# Altium PCB UZ_A_MAX11331.PcbDoc
Units mm, origin at the board's own origin, x right, y up, seen from the top; angles counter-clockwise.
Board outline 156 x 100 mm, 4 copper layers (Top Layer, GND, VCC, Bottom Layer), stack 0.778 mm thick; 30 components, 61 nets, 157 pads, 0 vias.
Unrouted connection lines stored in the file: 86.
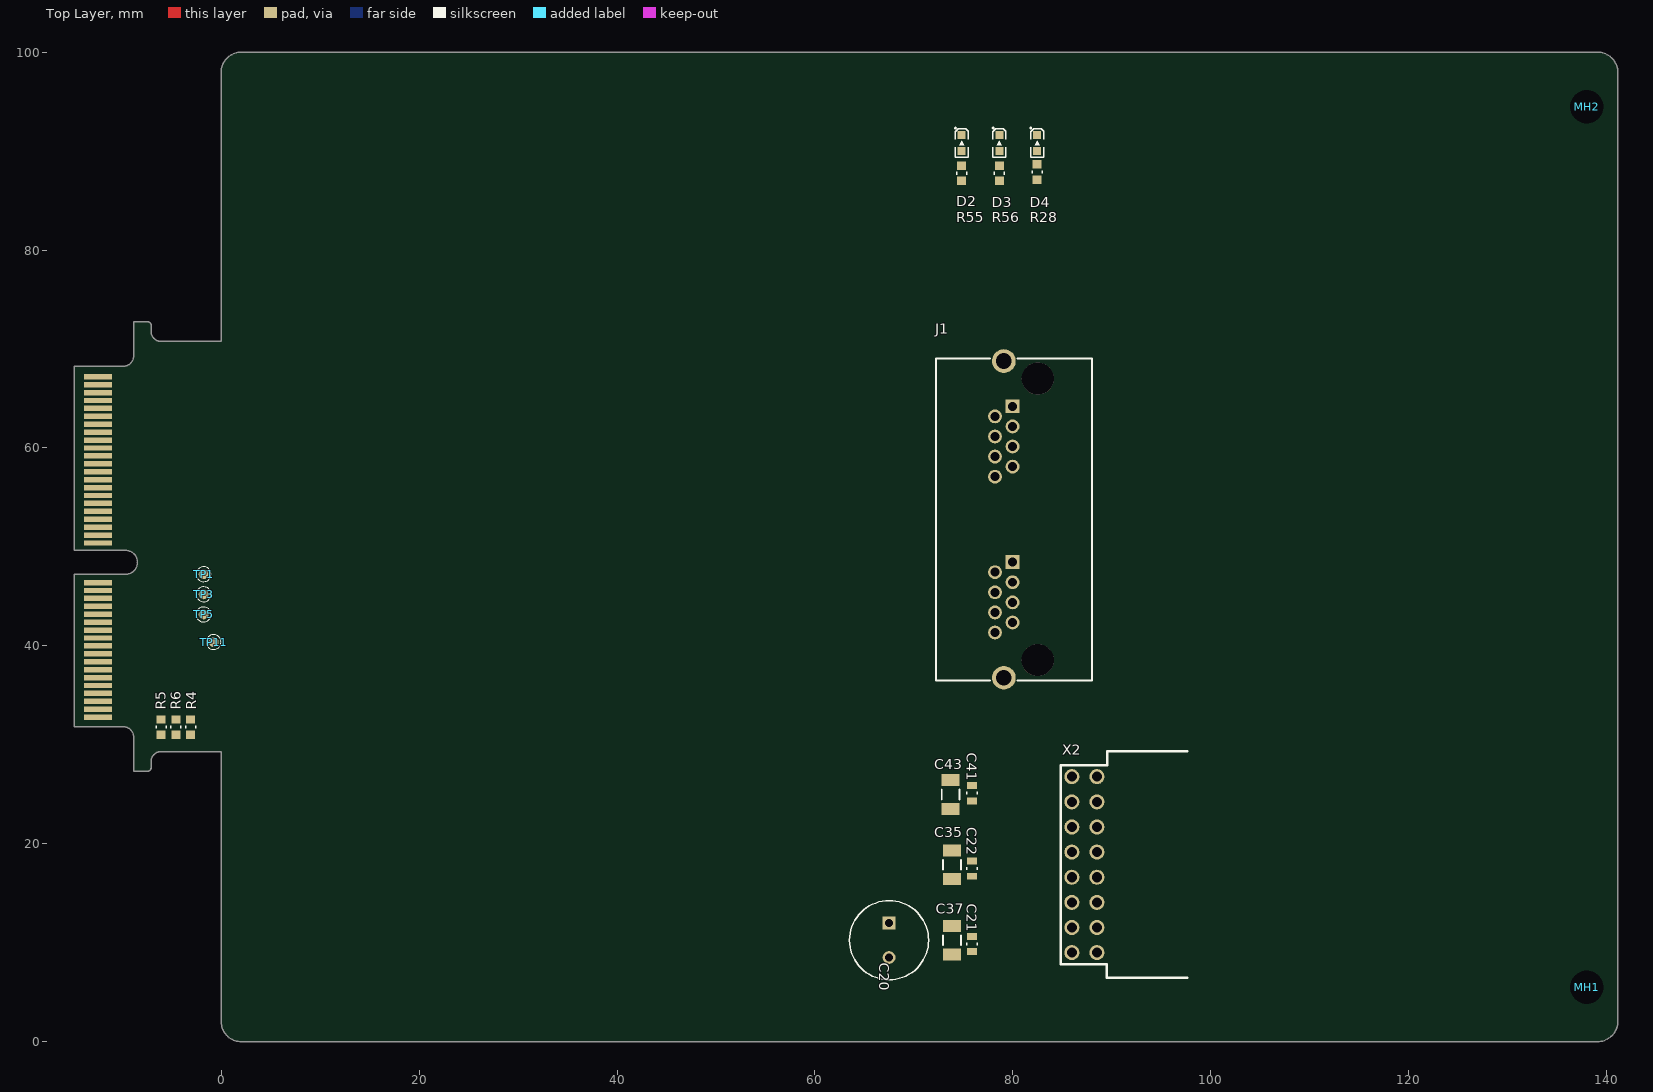
[diagram p0: Top Layer view]
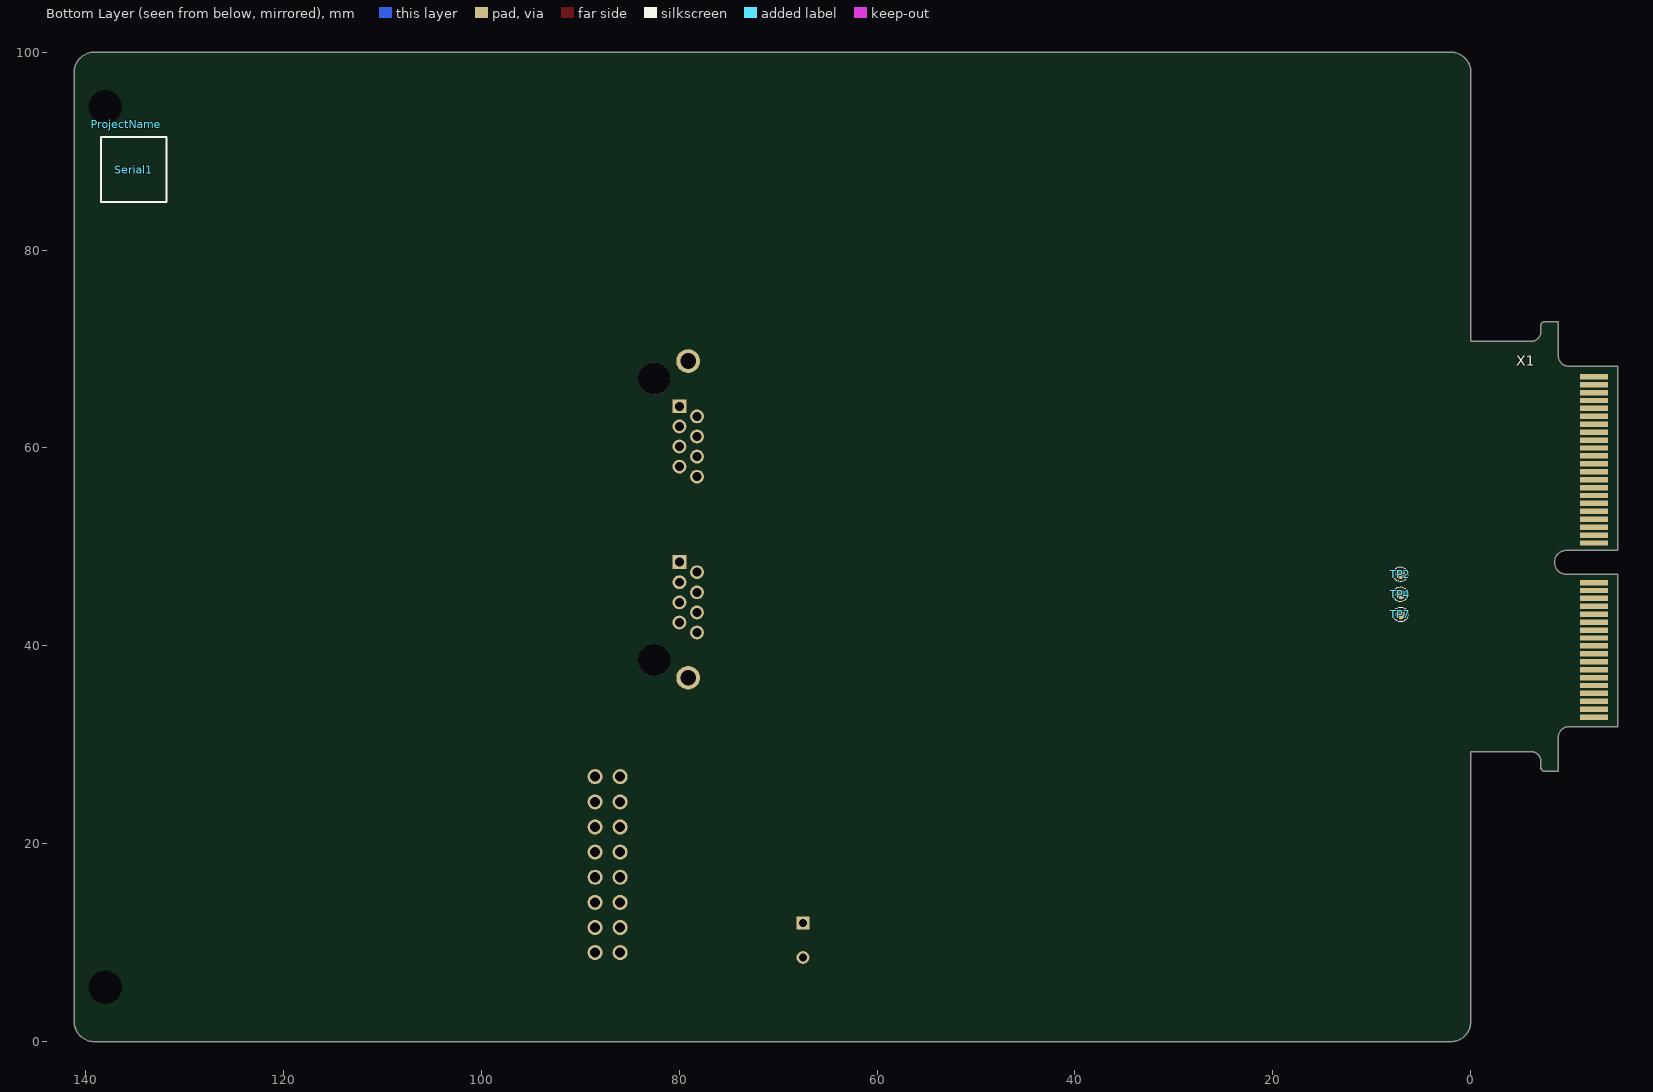
[diagram p1: Bottom Layer view, seen from below]

## Layer stack, top to bottom
Top Solder: solder mask 0.0102, Solder Resist, Dk 3.5
Top Layer: signal copper 0.0356
Dielectric 1: core 0.254, FR-4, Dk 4.2
GND: signal copper 0.036
Dielectric 3: prepreg 0.127, Dk 4.2
VCC: signal copper 0.036
Dielectric 2: core 0.254, Dk 4.2
Bottom Layer: signal copper 0.0356
Bottom Solder: solder mask 0.0102, Solder Resist, Dk 3.5

## Board outline
-14.859,31.821 -9.859,31.821 cw(c-9.859,30.821) -8.859,30.821 -8.859,27.321 -7.479,27.321 ccw(c-7.479,27.721) -7.079,27.721 -7.079,28.321 cw(c-6.079,28.321) -6.079,29.321 0,29.321 0,2.007 ccw(c2.032,2.032) 2.057,0 139.1,0 ccw(c139.1,2.04) 141.14,2.04 141.14,97.96 ccw(c139.1,97.96) 139.1,100 2.032,100 ccw(c2.032,97.968) 0,97.968 0,70.771 -6.079,70.771 cw(c-6.079,71.771) -7.079,71.771 -7.079,72.371 ccw(c-7.479,72.371) -7.479,72.771 -8.859,72.771 -8.859,69.271 cw(c-9.859,69.271) -9.859,68.271 -14.859,68.271 -14.859,49.646 -9.659,49.646 cw(c-9.659,48.446) -9.659,47.246 -14.859,47.246

## Design rules (kind name [scope] priority, off if disabled: settings)
BoardOutlineClearance BoardOutlineClearance_TopOverlay [OnLayer('Top Overlay') or OnLayer('Bottom Overlay')] p1: gap=0 ignorepadtopadclearanceinfootprint=FALSE
BoardOutlineClearance [All] p2: gap=0.508 ignorepadtopadclearanceinfootprint=FALSE except(0: Arc-SplitContinuation Track-SplitContinuation SMDPad-SplitContinuation THPad-SplitContinuation Via-SplitContinuation Fill-SplitContinuation Poly-SplitContinuation Region-SplitContinuation Text-OutlineEdge Text-CavityEdge Text-CutoutEdge Text-SplitBarrior Text-SplitContinuation; 0.254: SMDPad-OutlineEdge SMDPad-CavityEdge SMDPad-CutoutEdge SMDPad-SplitBarrior)
Clearance [All] p1: gap=0.089 ignorepadtopadclearanceinfootprint=FALSE except(0: Arc-Text Arc-Hole Track-Text Track-Hole SMDPad-Text SMDPad-Hole THPad-Text THPad-Hole Via-Text Via-Hole Fill-Text Fill-Hole Poly-Text Poly-Hole Region-Text Region-Hole Text-Text Text-Hole; 0.127: Arc-Via Track-Via SMDPad-Via THPad-Via Via-Via)
DiffPairsRouting [All] p1: maxlimit=0.254 minlimit=0.089 mostfreqgap=0.178 toplayer_minwidth=0.089 toplayer_maxwidth=0.381 toplayer_prefwidth=0.254 midlayer1_minwidth=0.089 midlayer1_maxwidth=0.381 midlayer1_prefwidth=0.254 midlayer2_minwidth=0.089 midlayer2_maxwidth=0.381 midlayer2_prefwidth=0.254 bottomlayer_minwidth=0.089 bottomlayer_maxwidth=0.381 bottomlayer_prefwidth=0.254 maxuncoupledlength=12.7
HoleSize [All] p1: absolutevalues=TRUE maxlimit=6.3 minlimit=0.2 maxpercent=80.000 minpercent=20.000
MatchedLengths [All] p1: tolerance=0.254 checknetsindiffpair=TRUE checkdiffpairvsdiffpair=FALSE checkxsignals=FALSE checkothers=FALSE
MinimumSolderMaskSliver [All] p1: minsoldermaskwidth=0.089
PlaneConnect [All] p1: pad.planeconnectstyle=Relief pad.reliefexpansion=0.508 pad.reliefentries=4 pad.reliefconductorwidth=0.254 pad.reliefairgap=0.254 via.planeconnectstyle=Direct via.reliefexpansion=0.508 via.reliefentries=4 via.reliefconductorwidth=0.254 via.reliefairgap=0.254
PolygonConnect PolygonConnect_GND [InNet('GND')] p1: thpad.connectstyle=Relief thpad.reliefconductorwidth=0.254 thpad.reliefentries=4 thpad.polygonreliefangle="90 Angle" thpad.airgapwidth=0.254 smdpad.connectstyle=Relief smdpad.reliefconductorwidth=0.254 smdpad.reliefentries=4 smdpad.polygonreliefangle="90 Angle" smdpad.airgapwidth=0.254 via.connectstyle=Direct via.reliefconductorwidth=0.254 via.reliefentries=4 via.polygonreliefangle="90 Angle" via.airgapwidth=0.254
PolygonConnect [All] p2: connectstyle=Direct reliefconductorwidth=0.254 reliefentries=4 polygonreliefangle="90 Angle" airgapwidth=0.127
RoomDefinition Component_KeepOut [All] p1: confinementstyle=ConfineOut formatcopy=TRUE lockcomponents=FALSE outline 0,97 142,97 142,100 0,100
RoutingVias [All] p1: holewidth=0.3 width=0.6 viastyle="Through Hole" minholewidth=0.2 minwidth=0.45 maxholewidth=0.8 maxwidth=1.6
SilkToSilkClearance [All] p1: silktosilkclearance=0
SilkToSolderMaskClearance [IsPad] p1: minsilkscreentomaskgap=0 clearancetoexposedcopper=TRUE
SolderMaskExpansion [All] p1: expansion=0.102 istentingtop=FALSE
Width [All] p1: maxlimit=0.762 minlimit=0.089 preferedwidth=0.254
24 further rules are at their usual default settings.

## Classes and differential pairs
net class AIN_B_P[1..4]: AIN_B_P1 AIN_B_P2 AIN_B_P3 AIN_B_P4
net class AIN_B_N[1..4]: AIN_B_N1 AIN_B_N2 AIN_B_N3 AIN_B_N4
net class AIN_A_P[1..4]: AIN_A_P1 AIN_A_P2 AIN_A_P3 AIN_A_P4
net class AIN_A_N[1..4]: AIN_A_N1 AIN_A_N2 AIN_A_N3 AIN_A_N4
component class U_CarrierConnector: R4 R5 R6 TP1 TP2 TP3 TP4 TP5 TP7 TP11 X1
component class U_AnalogConnector: C20 C21 C22 C35 C37 C41 C43 D2 D3 D4 J1 MH1 MH2 ProjectName R28 R55 R56 Serial1 X2

## Components (designator, comment, footprint, x,y, rotation, side; value= is the part's Value field where it differs from the comment)
C20 "220 uF" WCAP-ATG5_8X11.5X3.5 67.493,10.257 r90 top
C21 "100nF" CAPC1608X07N 75.875,9.876 r90 top
C22 "100nF" CAPC1608X07N 75.875,17.496 r90 top
C35 "10µF" C_1206 73.843,17.877 r270 top
C37 "10µF" C_1206 73.843,10.257 r270 top
C41 "100nF" CAPC1608X07N 75.875,25.116 r90 top
C43 "10µF" C_1206 73.716,24.989 r270 top
D2 "150060BS75000" WL-SMCW_0603 74.832,90.813 r270 top
D3 "150060GS75000" WL-SMCW_0603 78.642,90.813 r270 top
D4 "150060RS75000" WL-SMCW_0603 82.452,90.813 r270 top
J1 "RJHSE-5380-02" RJHSE-5380-02 82.518,38.558 r90 top
MH1 "mounting hole 3,4mm" MH_3.4#1 137.16,3.988 r0 top
MH2 "mounting hole 3,4mm" MH_3.4#2 137.16,94.437 r0 top
ProjectName "Project Name, Rev" ID_PROJECTREV 135.89,92.71 r180 bottom
R4 "0R" RESC1608X06N -3.086,31.79 r90 top
R5 "0R" RESC1608X06N -6.071,31.79 r270 top
R6 "0R" RESC1608X06N -4.572,31.79 r90 top
R28 "1k" RESC1608X06N 82.452,87.892 r270 top
R55 "20k" RESC1608X06N 74.832,87.765 r270 top
R56 "4.7k" RESC1608X06N 78.642,87.765 r270 top
Serial1 "Serialnumber 6,3 x 6.3mm" SERIAL_6.3X6.3MM 135.128,88.138 r180 bottom
TP1 "PIN47" TP_1MM -1.778,47.244 r0 top value="Testpoint 1mm"
TP2 "PIN48" TP_1MM 7.112,47.244 r180 bottom value="Testpoint 1mm"
TP3 "PIN49" TP_1MM -1.778,45.212 r0 top value="Testpoint 1mm"
TP4 "PIN50" TP_1MM 7.112,45.212 r180 bottom value="Testpoint 1mm"
TP5 "PIN53" TP_1MM -1.778,43.18 r0 top value="Testpoint 1mm"
TP7 "PIN56" TP_1MM 7.112,43.18 r180 bottom value="Testpoint 1mm"
TP11 "PIN53" TP_1MM -0.762,40.386 r0 top value="Testpoint 1mm"
X1 "HSEC8-140-01-XX-DV-A-BL-CARD" HSEC8-140-01-XX-DV-A-BL-CARD -14.846,50 r270 bottom
X2 "IPL1-108-01-L-D-RA-K" IPL1-108-01-L-D-RA-K 87.23,17.89 r270 top

## Footprints (in the part's own frame and the unit in brackets; to place one, negate y for a bottom-side part, rotate by r counter-clockwise, add the part's x,y. Pads: shape width x height; smd on the part's side, far side on the other; paste and mask are expansions set on the pad)
C_1206 [mm]
  rect 1.21x1.82 smd: 1(1.45,0) 2(-1.45,0)
  silkscreen extent -0.5,-0.9 0.5,0.9, body extent -1.6,-0.81 1.6,0.81, height 1.82
CAPC1608X07N [mm] "Chip Capacitor, 2-Leads, Body 1,60x0,80mm, IPC Medium Density"
  rect 0.7x1 smd: 1(-0.775,0) 2(0.775,0)
  silkscreen extent -0.13,-0.51 0.13,0.51, body extent -0.88,-0.48 0.88,0.47, height 0.7
HSEC8-140-01-XX-DV-A-BL-CARD [mm]
  rect 0.55x2.8 smd far side mask+0.05: 1(-17.2,-2.4) 3(-16.4,-2.4) 5(-15.6,-2.4) 7(-14.8,-2.4) 9(-14,-2.4) 11(-13.2,-2.4) 13(-12.4,-2.4) 15(-11.6,-2.4) 17(-10.8,-2.4) 19(-10,-2.4) 21(-9.2,-2.4) 23(-8.4,-2.4) 25(-7.6,-2.4) 27(-6.8,-2.4) 29(-6,-2.4) 31(-5.2,-2.4) 33(-4.4,-2.4) 35(-3.6,-2.4) 37(-2.8,-2.4) 39(-2,-2.4) 41(-1.2,-2.4) 43(-0.4,-2.4) 45(3.6,-2.4) 47(4.4,-2.4) 49(5.2,-2.4) 51(6,-2.4) 53(6.8,-2.4) 55(7.6,-2.4) 57(8.4,-2.4) 59(9.2,-2.4) 61(10,-2.4) 63(10.8,-2.4) 65(11.6,-2.4) 67(12.4,-2.4) 69(13.2,-2.4) 71(14,-2.4) 73(14.8,-2.4) 75(15.6,-2.4) 77(16.4,-2.4) 79(17.2,-2.4)
  rect 0.55x2.8 smd mask+0.05: 2(-17.2,-2.4) 4(-16.4,-2.4) 6(-15.6,-2.4) 8(-14.8,-2.4) 10(-14,-2.4) 12(-13.2,-2.4) 14(-12.4,-2.4) 16(-11.6,-2.4) 18(-10.8,-2.4) 20(-10,-2.4) 22(-9.2,-2.4) 24(-8.4,-2.4) 26(-7.6,-2.4) 28(-6.8,-2.4) 30(-6,-2.4) 32(-5.2,-2.4) 34(-4.4,-2.4) 36(-3.6,-2.4) 38(-2.8,-2.4) 40(-2,-2.4) 42(-1.2,-2.4) 44(-0.4,-2.4) 46(3.6,-2.4) 48(4.4,-2.4) 50(5.2,-2.4) 52(6,-2.4) 54(6.8,-2.4) 56(7.6,-2.4) 58(8.4,-2.4) 60(9.2,-2.4) 62(10,-2.4) 64(10.8,-2.4) 66(11.6,-2.4) 68(12.4,-2.4) 70(13.2,-2.4) 72(14,-2.4) 74(14.8,-2.4) 76(15.6,-2.4) 78(16.4,-2.4) 80(17.2,-2.4)
ID_PROJECTREV [mm] "project name + revision number"
IPL1-108-01-L-D-RA-K [mil]
  round 60 hole 40 mask+3: 1(-350,50) 2(-250,50) 3(-150,50) 4(-50,50) 5(50,50) 6(150,50) 7(250,50) 8(350,50) 9(-350,-50) 10(-250,-50) 11(-150,-50) 12(-50,-50) 13(50,-50) 14(150,-50) 15(250,-50) 16(350,-50)
  silkscreen extent -451,-94 451,410, body extent -430,-58 430,434, height 310
MH_3.4#1 [mm]
  round 3.1 hole 3.4 unplated: 1(0.84,1.512)
MH_3.4#2 [mm]
  round 3.1 hole 3.4 unplated: 1(0.84,0.063)
RESC1608X06N [mm] "Chip Resistor, 2-Leads, Body 1,60x0,80mm, IPC Medium Density"
  rect 0.85x0.9 smd: 1(-0.775,0) 2(0.775,0)
  silkscreen extent -0.13,-0.51 0.13,0.51, body extent -0.8,-0.4 0.8,0.4, height 0.44
RJHSE-5380-02 [mm] "Modular Jack Horizontal Shielded Dual Port 8P8C Tab Up"
  rect 1.4x1.4 hole 0.9: A1(9.906,2.54) B1(25.654,2.54)
  round 1.4 hole 0.9: A2(8.89,4.318) A3(7.874,2.54) A4(6.858,4.318) A5(5.842,2.54) A6(4.826,4.318) A7(3.81,2.54) A8(2.794,4.318) B2(24.638,4.318) B3(23.622,2.54) B4(22.606,4.318) B5(21.59,2.54) B6(20.574,4.318) B7(19.558,2.54) B8(18.542,4.318)
  round 3.25 hole 3.25 unplated: MH1(0,0) MH2(28.448,0)
  round 2.4 hole 1.6: S1(-1.778,3.429) S2(30.226,3.429)
  silkscreen extent -2.03,-5.46 30.48,10.29, body extent -3.5,-5.41 31.95,10.29, height 15.06
SERIAL_6.3X6.3MM [mm]
  silkscreen extent -3.3,-3.3 3.3,3.3
TP_1MM [mm]
  round 1 smd paste-1: 1(0,0)
  silkscreen extent -0.75,-0.75 0.75,0.75
WCAP-ATG5_8X11.5X3.5 [mm] "Aluminum Electrolytic Capacitors, 8x11.5mm"
  rect 1.3x1.3 hole 0.8: 1(1.75,0)
  round 1.3 hole 0.8: 2(-1.75,0)
  silkscreen extent -4,-4 4,4, body extent -3.99,-4 4,4, height 11.81
WL-SMCW_0603 [mm] "SMD Mono-color Chip LED, body 1.6x0.8mm"
  rect 0.8x0.8 smd: 1(-0.8,0) 2(0.8,0)
  silkscreen extent -1.59,-0.7 1.45,0.65, body extent -0.8,-0.4 0.8,0.4, height 0.7

## Part data
C20: library part 860020574012, "WCAP-ATG5 Aluminum Electrolytic Capacitors, 8x11.5mm, 35 Vdc, 220 uF", Operating Temperature="-40 °C up to +105 °C", Supplier Part Number 1=710-860020574012, Voltage=35V, ComponentLink1Description=Manufacturer, ComponentLink1URL=http://www.we-online.de, ComponentLink2Description=Datasheet, ComponentLink2URL=http://katalog.we-online.com/pbs/datasheet/860020574012.pdf, Life Cycle=2000h, MF="Wurth Elektronik", MPN=860020574012, Part Number=860020574012, Published Date="Sep. 2017", Size=8x11.5mm, Supplier 1=Mouser
C21 C22 C41: library part Cap_0603, Dielectric=X7R, MPN=885012206071, Package=0603, Supplier Part Number 1=710-885012206071, Voltage=25V, MF=Würth, Supplier 1=Mouser
C35 C37 C43: "Capacitor 1206", Dielectric=X5R, MPN=GRM319R6YA106KA12D, Package=1206, Supplier Part Number 1=81-GRM319R6YA106KA2D, Tolerance=10%, Voltage=35V, Created=2018_06_25_AGeiger, MF="Murata Electronics", Supplier 1=Mouser
D2: library part LED_Blue_0603, "WL-SMCW SMD Mono-color Chip LED Waterclear, size 0603, Blue, 3.2 V, 140°", Emitting Color=Blue, Forward Voltage="3.2 V", Package=0603, Supplier Part Number 1=2322069, ComponentLink1Description=Manufacturer, ComponentLink1URL=http://www.we-online.de, ComponentLink2Description=Datasheet, ComponentLink2URL=http://katalog.we-online.com/led/datasheet/150060BS75000.pdf, Created=2018_09_06_AGeiger, Dominant Wavelength="470 nm", Luminous Intensity="145 mcd", MF="Wuerth Elektronik", MPN=150060BS75000, Peak Wavelength="465 nm", Published Date="Sep. 2017", Size=0603, Supplier 1=Farnell, Supplier 2=Mouser, Supplier 3=Digi-Key, Supplier Part Number 2=710-150060BS75000, Supplier Part Number 3=732-4966-1-ND, Viewing Angle=140°
D3: library part LED_Green_0603, "WL-SMCW SMD Mono-color Chip LED Waterclear, size 0603, Green, 3.2 V, 140°", Emitting Color=Green, Forward Voltage="3.2 V", Package=0603, Supplier Part Number 1=2322070, ComponentLink1Description=Manufacturer, ComponentLink1URL=http://www.we-online.de, ComponentLink2Description=Datasheet, ComponentLink2URL=http://katalog.we-online.com/led/datasheet/150060GS75000.pdf, Created=2018_09_06_AGeiger, Dominant Wavelength="520 nm", Luminous Intensity="430 mcd", MF="Wuerth Elektronik", MPN=150060GS75000, Peak Wavelength="515 nm", Published Date="Sep. 2017", Size=0603, Supplier 1=Farnell, Supplier 2=Mouser, Supplier 3=Digi-Key, Supplier Part Number 2=710-150060GS75000, Supplier Part Number 3=732-4971-1-ND, Viewing Angle=140°
D4: library part LED_Red_0603, "WL-SMCW SMD Mono-color Chip LED Waterclear, size 0603, Red, 2 V, 140°", Emitting Color=Red, Forward Voltage="2 V", Package=0603, Supplier Part Number 1=2322071, ComponentLink1Description=Manufacturer, ComponentLink1URL=http://www.we-online.de, ComponentLink2Description=Datasheet, ComponentLink2URL=http://katalog.we-online.com/led/datasheet/150060RS75000.pdf, Created=2018_09_06_AGeiger, Dominant Wavelength="625 nm", Luminous Intensity="250 mcd", MF="Wuerth Elektronik", MPN=150060RS75000, Peak Wavelength="630 nm", Published Date="Sep. 2017", Size=0603, Supplier 1=Farnell, Supplier 2=Mouser, Supplier 3=Digi-Key, Supplier Part Number 2=710-150060RS75000, Supplier Part Number 3=732-4978-1-ND, Viewing Angle=140°
J1: "Modular Jack WR-MJ, Tab Up, Shielded, Dual Port, Righ Angle, THT, 8P8C", Contact Resistance="20 mOhm", Operating Temperature="-40 to 85 degC", Rated Current="1.5 A", Supplier Part Number 1=523-RJHSE-5380-02, Withstanding Voltage="1000 VAC", Working Voltage="120 VAC", Compliance="Lead free / RoHS", ComponentLink1Description=Manufacturer, ComponentLink1URL=http://www.we-online.de, ComponentLink2Description=Datasheet, ComponentLink2URL=https://katalog.we-online.de/em/datasheet/615016137621.pdf, Entrance="Right Angle", MF=Amphenol, Mounting Technology=THT, MPN=RJHSE-5380-02, Packaging=Tray, Pin Number=8P8C, Port=1x2, Published Date="July 2018", Supplier 1=Mouser
MH1 MH2: library part "Mounting Hole", "Non plated through hole, 3.4mm"
ProjectName: "Project Name and Revision Number", Created=2018_11_23_AGeiger
R4 R5 R6: library part R_0603, MPN=CRCW06030000Z0EBC, Package=0603, Supplier Part Number 1=71-CRCW06030000Z0EBC, MF="Vishay / Dale", Supplier 1=Mouser
R28: library part R_0603, MPN=CRCW06031K00JNEAC, Package=0603, Supplier Part Number 1=71-CRCW06031K00JNEAC, MF="Vishay / Dale", Supplier 1=Mouser
R55: library part R_0603, MPN=CRCW060320K0JNEAC, Package=0603, Supplier Part Number 1=71-CRCW060320K0JNEAC, MF="Vishay / Dale", Supplier 1=Mouser
R56: library part R_0603, MPN=CRCW06034K70JNEAC, Package=0603, Supplier Part Number 1=71-CRCW06034K70JNEAC, MF="Vishay / Dale", Supplier 1=Mouser
TP1 TP2 TP3 TP4 TP5 TP7 TP11: "Testpoint 1mm", Created=2018_06_25_AGeiger
X1: "Mating Card Layout for HSEC8-140-01-XX-DV-A-BL", Manufacturer=SAMTEC, Created=2018_04_23_AGeiger
X2: library part IPL1-108-XX-X-D-X, "2.54mm Double Row Terminal Assembly", Supplier Part Number 1=200-IPL110801LDRAK, Created=2018_09_17_AGeiger, MF=SAMTEC, MPN=IPL1-108-01-L-D-RA-K, Supplier 1=Mouser
Serial1: Created=2018_09_18_AGeiger

## Nets (pads, with @x,y where several pads share a name; then routed paths per layer and width w, separated by ;. In a path a pad name is that pad's centre, name@x,y a point inside that pad or via, vN(x,y) a via of type N, cw(c..) or ccw(c..) an arc to the next point about the centre after c; other vN are vias at no path point)
3V3: X1.13 X1.14
5V: X1.9 X1.10
AIN_A_N1: J1.A8
AIN_A_N2: J1.A5
AIN_A_N3: J1.A6
AIN_A_N4: J1.A2
AIN_A_P1: J1.A7
AIN_A_P2: J1.A4
AIN_A_P3: J1.A3
AIN_A_P4: J1.A1
AIN_B_N1: J1.B8
AIN_B_N2: J1.B5
AIN_B_N3: J1.B6
AIN_B_N4: J1.B2
AIN_B_P1: J1.B7
AIN_B_P2: J1.B4
AIN_B_P3: J1.B3
AIN_B_P4: J1.B1
ANL_00_N: X1.19
ANL_00_P: X1.17
ANL_01_N: X1.20
ANL_01_P: X1.18
ANL_02_N: X1.25
ANL_02_P: X1.23
ANL_03_N: X1.26
ANL_03_P: X1.24
ANL_04_N: X1.31
ANL_04_P: X1.29
ANL_05_N: X1.32
ANL_05_P: X1.30
ANL_06_N: X1.37
ANL_06_P: X1.35
ANL_07_N: X1.38
ANL_07_P: X1.36
ANL_08_N: X1.43
ANL_08_P: X1.41
ANL_09_N: X1.44
ANL_09_P: X1.42
ANL_Res_00: X1.59
ANL_Res_01: X1.60
ANL_Res_02: X1.61
ANL_Res_03: TP11.1 X1.62
ANL_Res_05: X1.66
ANL_Res_07: X1.68
ANL_Res_14: X1.55
ANL_SPI_CLK: TP2.1 X1.48
ANL_SPI_CS: TP5.1 X1.53 X1.54
ANL_SPI_MOSI: TP1.1 X1.47
GND: C20.2 C21.1 C22.1 C35.1 C37.1 C41.1 C43.1 D2.1 D3.1 D4.1 J1.S1 J1.S2 R6.1 X1.1 X1.2 X1.3 X1.4 X1.7 X1.8 X1.11 X1.12 X1.15 X1.16 X1.21 X1.22 X1.27 X1.28 X1.33 X1.34 X1.39 X1.40 X1.45 X1.46 X1.51 X1.52 X1.57 X1.58 X1.63 X1.64 X1.69 X1.70 X1.75 X1.76 X2.2 X2.5 X2.8 X2.10 X2.13 X2.16
NetD2_2: D2.2 R55.1
NetD3_2: D3.2 R56.1
NetD4_2: D4.2 R28.1
NetR4_2: R4.2 R5.1 R6.2 X1.79
NetR5_2: R5.2 X1.80
NetX1_78: X1.78
OVCC: R28.2
PS_ANL_shared: TP7.1 X1.56
PS_I2C0_shared_SCL: TP3.1 X1.49
PS_I2C0_shared_SDA: TP4.1 X1.50
VCC: C20.1 C21.2 C22.2 C35.2 C37.2 R4.1 R56.2 X2.3 X2.4 X2.6 X2.7 X2.11 X2.12 X2.14 X2.15
VIN: C41.2 C43.2 R55.2 X1.5 X1.6 X2.1 X2.9
pads on no net: J1.MH1 J1.MH2 MH1.1 MH2.1 X1.65 X1.67 X1.71 X1.72 X1.73 X1.74 X1.77

## Silkscreen, mask and mechanical layers (free items; w line width, h text height)
Mechanical 1:
  lines w0.1: -14.859,31.821 -14.08,31.821 -9.859,31.821 cw(c-9.859,30.821) -8.859,30.821 -8.859,27.321 -7.479,27.321 ccw(c-7.479,27.721) -7.079,27.721 -7.079,28.321 cw(c-6.079,28.321) -6.079,29.321 -0.019,29.321 0,29.321 0,2.007 ccw(c2.032,2.032) 2.057,0 139.1,0 ccw(c139.1,2.04) 141.14,2.04 141.14,97.96 ccw(c139.1,97.96) 139.1,100 2.032,100 ccw(c2.032,97.968) 0,97.968 0,70.771 -6.079,70.771 cw(c-6.079,71.771) -7.079,71.771 -7.079,72.371 ccw(c-7.479,72.371) -7.479,72.771 -8.859,72.771 -8.859,69.271 cw(c-9.859,69.271) -9.859,68.271 -14.08,68.271 -14.859,68.271 -14.859,49.646 -14.08,49.646 -9.659,49.646 cw(c-9.659,48.446) -9.659,47.246 -14.08,47.246 -14.859,47.246 -14.859,31.821

## Dimensions
138,5.5 to 138,94.5 on Mechanical 2

## Text inside footprints (layer, text, board x,y; h text height)
Serial1: Mechanical 6 "SerialNr" at 132.628,86.438 h0.7 r180